# EAGLE board PCB (EAGLE 9.7.0)
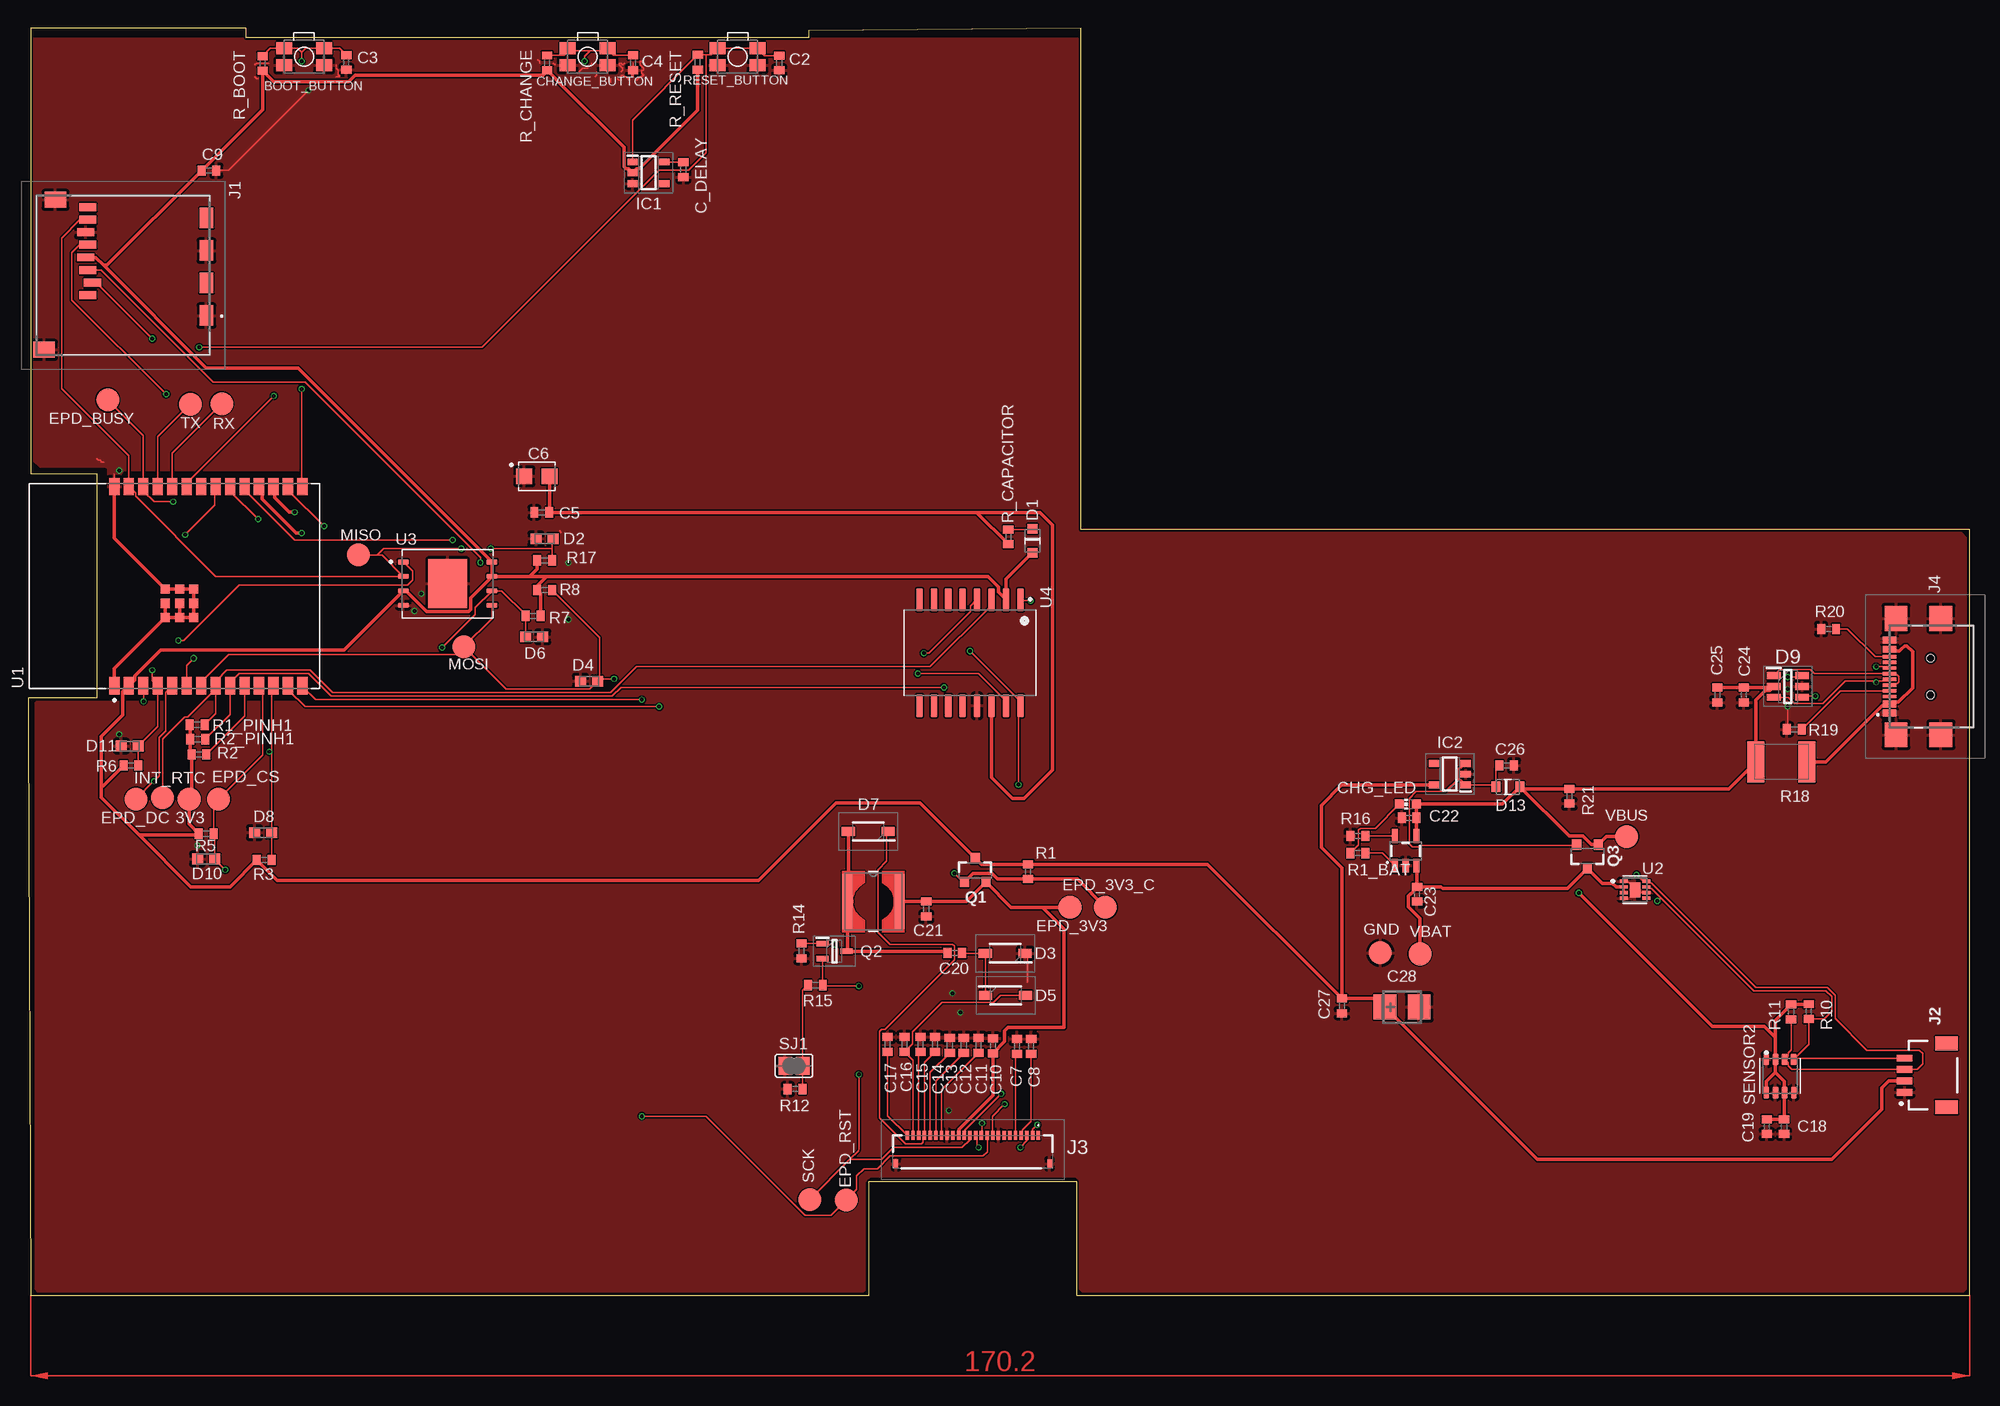
[diagram p0: board, top side]
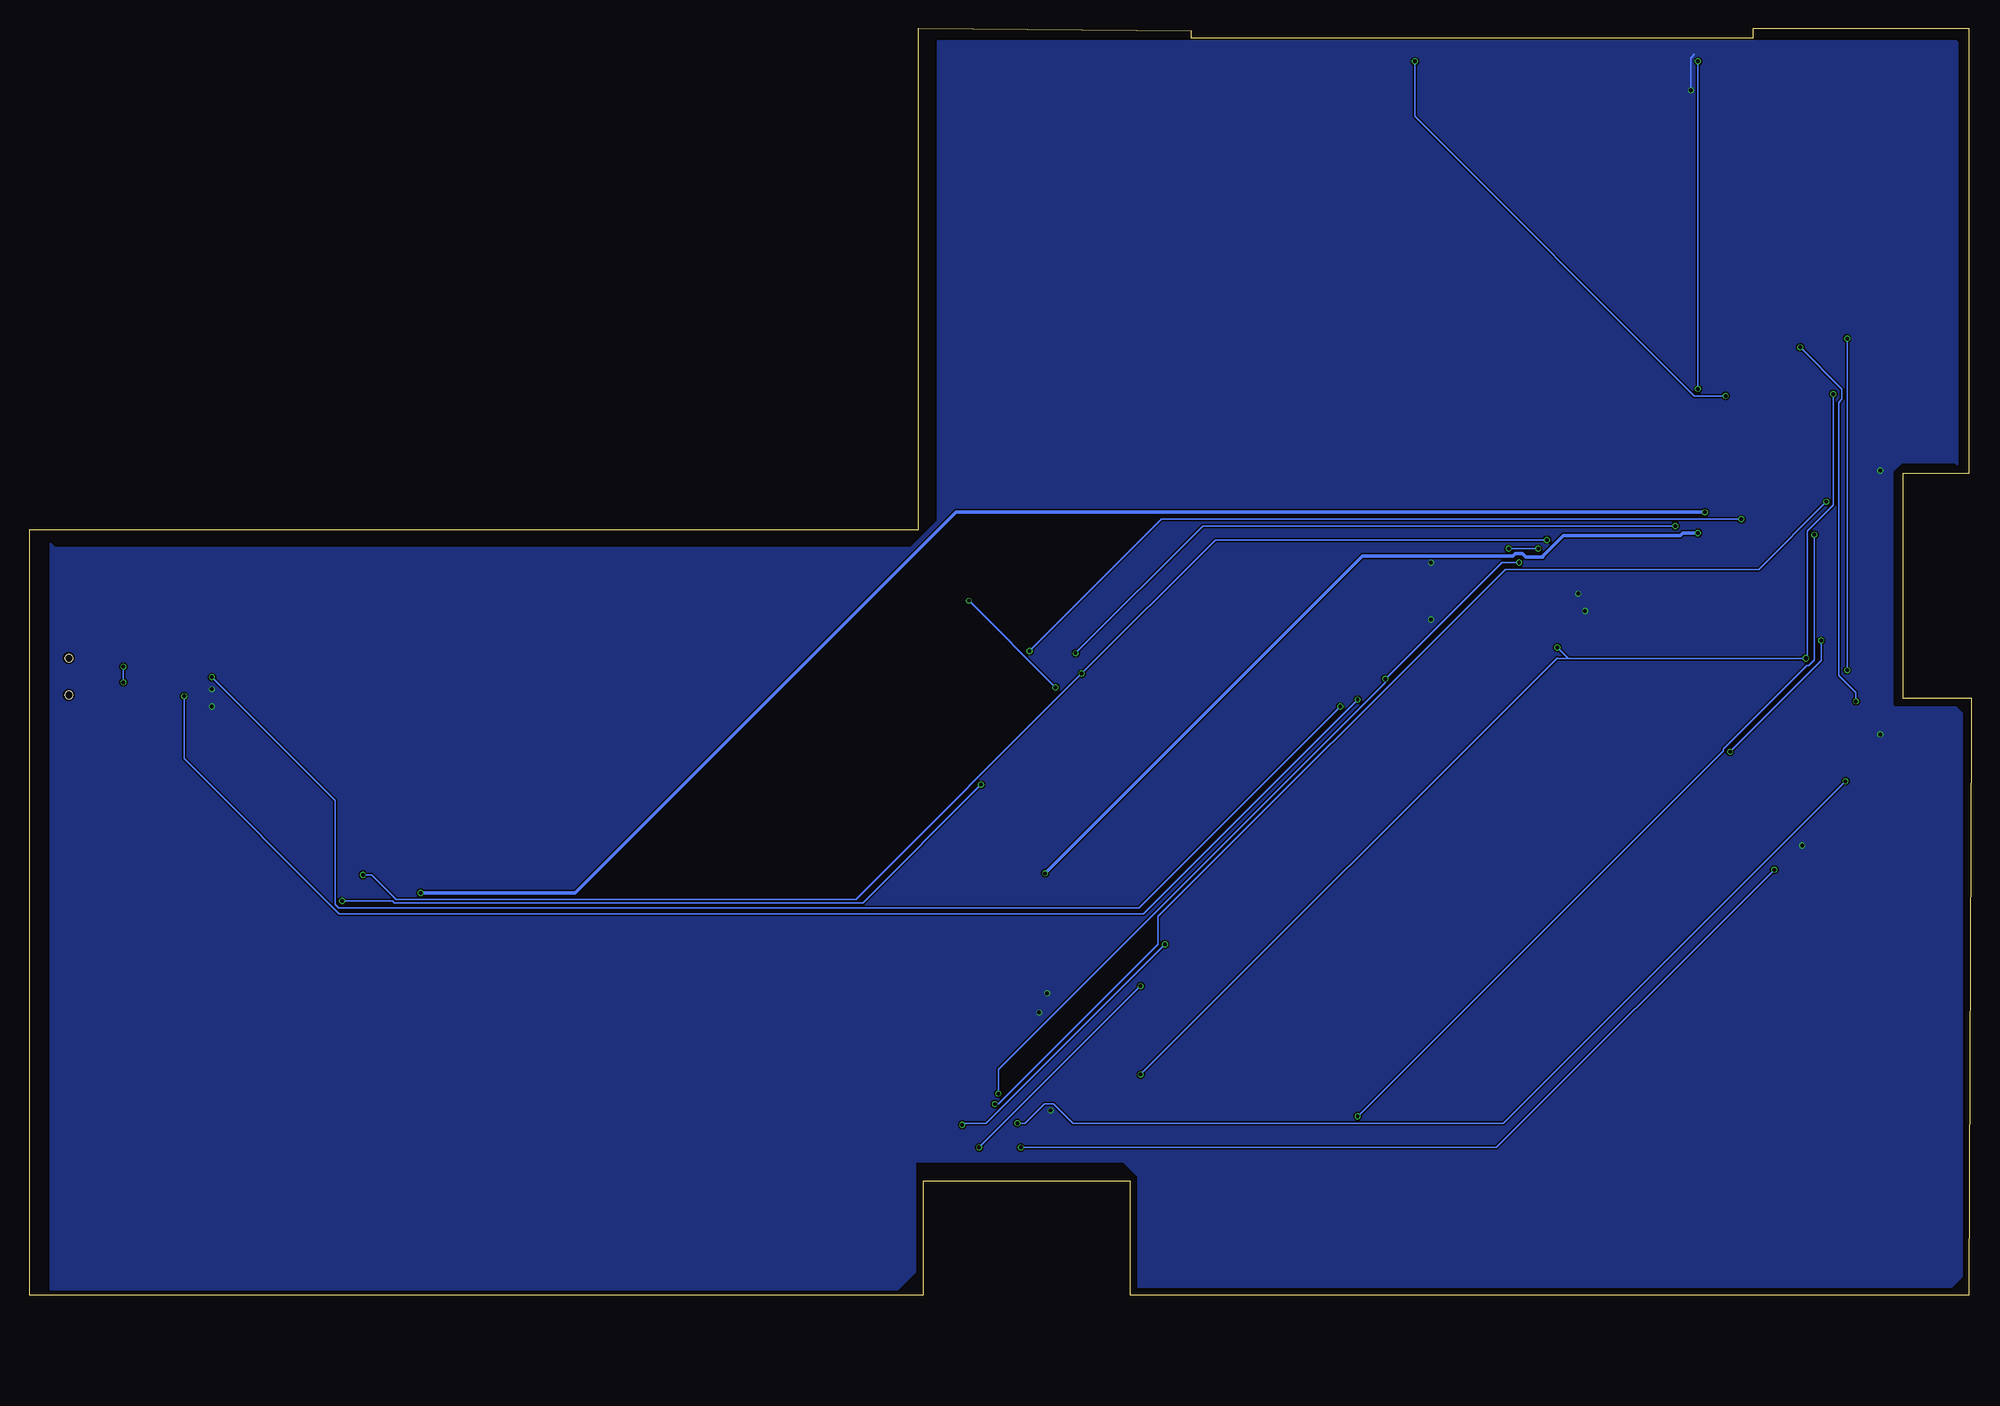
[diagram p1: board, bottom side, seen from below]

Size 170.4 x 111.2 mm. Coordinates in mm from the lower left corner, seen from the top.
Outline: 0.2,0 73.8,0 73.8,10 92,10 92,0 170.4,0 170.4,67.2 92.4,67.2 92.4,111.2 68.5,111 68.5,110.4 19.1,110.4 19.1,111.2 0.2,111.2 0.2,72.1 6,72.1 6,52.4 0,52.4 0,49.9 0.2,0
Copper layers (1*16): Top 0.035mm / dielectric 1.6mm / Bottom 0.035mm
Design rules "jlcpcb-2layers.dru": minimum track width 5mil, minimum drill 0.3mm, track to track 5mil, track to pad 5mil, pad to pad 5mil, via to via 5mil, smd to smd 5mil, copper to edge 0.2mm, drill to drill 6mil, minimum pad ring 10mil, minimum via ring 3mil, stop-mask expansion 4mil, vias tented up to drill 0mil, thermal gap 10mil

## Footprints (pad centres in the part's own frame; a part is rotated, then mirrored left to right if it is on the bottom)
MYBUTTON = smd 1.4 x 1.05: 1 1.75,0.75; 2 -1.75,0.75; 3 -1.75,-0.75; 4 1.75,-0.75
EAGLE-LTSPICE_C0402 = smd 0.7 x 0.9: 1 -0.65,0; 2 0.65,0
CAPCP3225X100N = smd 1.4 x 1.4: 1 -1.1,0; 2 1.1,0
ESP32_WROVER_EAGLE-LTSPICE_C0402 = smd 0.7 x 0.9: 1 -0.65,0; 2 0.65,0
RCL_CT3528 = smd 2 x 2.2: + -1.5,0; - 1.5,0
ADAFRUIT_CHIP-LED0603 = smd 0.8 x 0.8: A 0,-0.75; C 0,0.75
ESP32_WROVER_AVX---SD0805S020S1R0_AVX_SD0805S020S1R0_0 = smd 0.8 x 0.9: 1 -1.05,0; 2 1.05,0
DIOC1608X36N = smd 0.97 x 0.94: 1 -0.75,0; 2 0.75,0
SOD3716X135N = smd 1.15 x 0.8: 1 -1.75,0; 2 1.75,0
SOT95P280X145-6N = smd 1.2 x 0.6: 1 -1.25,0.95; 2 -1.25,0; 3 -1.25,-0.95; 4 1.25,-0.95; 5 1.25,0; 6 1.25,0.95
SOT95P280X125-5N = smd 0.9 x 0.6: 1 -1.4,0.95; 2 -1.4,0; 3 -1.4,-0.95; 4 1.4,-0.95; 5 1.4,0.95
SOT95P280X120-5N = smd 0.9 x 0.6: 1 -1.4,0.95; 2 -1.4,0; 3 -1.4,-0.95; 4 1.4,-0.95; 5 1.4,0.95
112ATAARR03ATTEND = smd 1.8 x 1.2: G1 10.6,10.4; G2 4.9,10.4; S1 7.75,10.4; S2 2.05,10.4 | smd 1.4 x 1.9: G3 13.6,-3.85; G4 0.45,-2.85 | smd 0.7 x 1.5: P1 8.8,0; P2 7.7,0.4; P3 6.6,0; P4 5.5,-0.2; P5 4.4,0; P6 3.3,-0.2; P7 2.2,0; P8 1.1,0
JST04_1MM_RA = smd 0.6 x 1.35: 1 -1.5,0; 2 -0.5,0; 3 0.5,0; 4 1.5,0 | smd 1.2 x 2: NC1 2.8,-3.675; NC2 -2.8,-3.675
FH34SRJ24S05SH99 = smd 0.3 x 0.8: 1 5.75,1.45; 2 5.25,1.45; 3 4.75,1.45; 4 4.25,1.45; 5 3.75,1.45; 6 3.25,1.45; 7 2.75,1.45; 8 2.25,1.45; 9 1.75,1.45; 10 1.25,1.45; 11 0.75,1.45; 12 0.25,1.45; 13 -0.25,1.45; 14 -0.75,1.45; 15 -1.25,1.45; 16 -1.75,1.45; 17 -2.25,1.45; 18 -2.75,1.45; 19 -3.25,1.45; 20 -3.75,1.45; 21 -4.25,1.45; 22 -4.75,1.45; 23 -5.25,1.45; 24 -5.75,1.45 | smd 0.4 x 0.8: MP1 6.75,-1.05; MP2 -6.75,-1.05
SAMACSYS_PARTS_USB4110GFA = smd 0.3 x 1.15: A1 -3.35,3.678; A4 -2.55,3.678; A5 -1.25,3.678; A6 -0.25,3.678; A7 0.25,3.678; A8 1.25,3.678; A9 2.55,3.678; A12 3.35,3.678; B1 3.05,3.678; B4 2.25,3.678; B5 1.75,3.678; B6 0.75,3.678; B7 -0.75,3.678; B8 -1.75,3.678; B9 -2.25,3.678; B12 -3.05,3.678 | smd 2.18 x 2: MP1 -5.11,-0.827; MP2 5.11,-0.827; MP3 -5.11,3.103; MP4 5.11,3.103 | hole 0.65: -1.62,0.063; 1.62,0.063
IND_4828-WE-TPC_WRE = smd 0.889 x 4.826: 1 -2.286,0; 2 2.286,0
ESP32_WROVER_SPARKFUN-IC-POWER_SOT23-5 = smd 0.55 x 1.2: 1 -0.95,-1.3; 2 0,-1.3; 3 0.95,-1.3; 4 0.95,1.3; 5 -0.95,1.3
ESP32_WROVER_SPARKFUN-DISCRETESEMI_SOT23-3 = smd 0.8 x 0.9: 1 -0.95,-1; 2 0.95,-1; 3 0,1.1
SOT65P210X110-3N = smd 1.05 x 0.5: 1 -1.05,0.65; 2 -1.05,-0.65; 3 1.05,0
ESP32_WROVER_EAGLE-LTSPICE_R0402 = smd 0.7 x 0.9: 1 -0.65,0; 2 0.65,0
ESP32C6_VARISTOR_CT/CN1812 = smd 1.5 x 3.6: 1 -2.25,0; 2 2.25,0
ESP32_WROVER_BME680_PSON80P300X300X100-8N = smd 1.016 x 0.5: 1 1.458,1.2; 2 1.458,0.4; 3 1.458,-0.4; 4 1.458,-1.2; 5 -1.458,-1.22; 6 -1.458,-0.4; 7 -1.458,0.4; 8 -1.458,1.2
SJ = smd 1.168 x 1.6: 1 -0.762,0; 2 0.762,0
TP20R = smd 2 x 2: TP 0,0
XCVR_ESP32-C6-WROOM-1-N8 = smd 1.5 x 0.9: 1 -8.75,5.26; 2 -8.75,3.99; 3 -8.75,2.72; 4 -8.75,1.45; 5 -8.75,0.18; 6 -8.75,-1.09; 7 -8.75,-2.36; 8 -8.75,-3.63; 9 -8.75,-4.9; 10 -8.75,-6.17; 11 -8.75,-7.44; 12 -8.75,-8.71; 13 -8.75,-9.98; 14 -8.75,-11.25; 15 8.75,-11.25; 16 8.75,-9.98; 17 8.75,-8.71; 18 8.75,-7.44; 19 8.75,-6.17; 20 8.75,-4.9; 21 8.75,-3.63; 22 8.75,-2.36; 23 8.75,-1.09; 24 8.75,0.18; 25 8.75,1.45; 26 8.75,2.72; 27 8.75,3.99; 28 8.75,5.26 | smd 0.8 x 0.8: 29_1 -2.755,0.79; 29_2 -1.505,0.79; 29_3 -0.255,0.79; 29_4 -2.755,-0.46; 29_5 -1.505,-0.46; 29_6 -0.255,-0.46; 29_7 -2.755,-1.71; 29_8 -1.505,-1.71; 29_9 -0.255,-1.71
SON50P200X200X80-9N = smd 0.76 x 0.27: 1 -0.985,0.75; 2 -0.985,0.25; 3 -0.985,-0.25; 4 -0.985,-0.75; 5 0.985,-0.75; 6 0.985,-0.25; 7 0.985,0.25; 8 0.985,0.75 | smd 0.9 x 1.3: 9 0,0
SON127P600X800X80-9N = smd 0.94 x 0.44: 1 -3.895,1.905; 2 -3.895,0.635; 3 -3.895,-0.635; 4 -3.895,-1.905; 5 3.895,-1.905; 6 3.895,-0.635; 7 3.895,0.635; 8 3.895,1.905 | smd 3.4 x 4.3: 9 0,0
SOIC127P1032X265-16N = smd 2.05 x 0.59: 1 -4.655,4.445; 2 -4.655,3.175; 3 -4.655,1.905; 4 -4.655,0.635; 5 -4.655,-0.635; 6 -4.655,-1.905; 7 -4.655,-3.175; 8 -4.655,-4.445; 9 4.655,-4.445; 10 4.655,-3.175; 11 4.655,-1.905; 12 4.655,-0.635; 13 4.655,0.635; 14 4.655,1.905; 15 4.655,3.175; 16 4.655,4.445

## Placement (x,y rotation side)
BOOT_BUTTON  BUTTON_CUSYOMV1  [MYBUTTON]  24.2,108.71 180 top
C2  1uF  [EAGLE-LTSPICE_C0402]  65.91,108.17 270 top
C3  100nF  [EAGLE-LTSPICE_C0402]  27.9,108.21 270 top
C4  100nF  [EAGLE-LTSPICE_C0402]  53.08,108.18 270 top
C5  100nF  [EAGLE-LTSPICE_C0402]  45.06,68.71 180 top
C6  CPH3225A  [CAPCP3225X100N]  44.63,71.88 0 top
C7  1uF/50V  [EAGLE-LTSPICE_C0402]  86.77,21.83 270 top
C8  1uF/50V  [EAGLE-LTSPICE_C0402]  88.02,21.83 270 top
C9  100nF  [EAGLE-LTSPICE_C0402]  15.84,98.71 0 top
C10  1uF/50V  [EAGLE-LTSPICE_C0402]  84.67,21.88 270 top
C11  1uF/50V  [EAGLE-LTSPICE_C0402]  83.4,21.93 270 top
C12  1uF/50V  [EAGLE-LTSPICE_C0402]  82.11,21.93 270 top
C13  1uF/50V  [EAGLE-LTSPICE_C0402]  80.88,21.91 270 top
C14  1uF/50V  [EAGLE-LTSPICE_C0402]  79.59,22.01 270 top
C15  1uF/50V  [EAGLE-LTSPICE_C0402]  78.3,22.01 270 top
C16  1uF/50V  [EAGLE-LTSPICE_C0402]  76.91,22.01 270 top
C17  1uF/50V  [EAGLE-LTSPICE_C0402]  75.42,22.01 270 top
C18  100nF  [EAGLE-LTSPICE_C0402]  154.12,14.79 270 top
C19  100nF  [EAGLE-LTSPICE_C0402]  152.6,14.79 270 top
C20  4.7uF/25V  [ESP32_WROVER_EAGLE-LTSPICE_C0402]  81.31,30.03 180 top
C21  10uF  [ESP32_WROVER_EAGLE-LTSPICE_C0402]  78.81,33.89 270 top
C22  4.7uF  [EAGLE-LTSPICE_C0402]  121.2,41.9 180 top
C23  4.7uF  [EAGLE-LTSPICE_C0402]  121.9,35.2 270 top
C24  100nF  [ESP32_WROVER_EAGLE-LTSPICE_C0402]  150.58,52.69 270 top
C25  4.7uF  [ESP32_WROVER_EAGLE-LTSPICE_C0402]  148.26,52.69 270 top
C26  4.7uF  [ESP32_WROVER_EAGLE-LTSPICE_C0402]  129.76,46.49 0 top
C27  4.7uF  [ESP32_WROVER_EAGLE-LTSPICE_C0402]  115.3,25.39 270 top
C28  100uF  [RCL_CT3528]  120.58,25.29 0 top
C_DELAY  100nF  [EAGLE-LTSPICE_C0402]  57.49,98.81 270 top
CHANGE_BUTTON  BUTTON_CUSYOMV1  [MYBUTTON]  49.09,108.71 180 top
CHG_LED  [ADAFRUIT_CHIP-LED0603]  121.1,43.1 90 top
D1  ESP32_WROVER_AVX---SD0805S020S1R0_AVX_SD0805S020S1R0_0_0AVX_SD0805S020S1R0_0_0  [ESP32_WROVER_AVX---SD0805S020S1R0_AVX_SD0805S020S1R0_0]  88.13,66.22 270 top
D2  PGB1010603MR  [DIOC1608X36N]  45.3,66.4 0 top
D3  MBR0530  [SOD3716X135N]  85.74,30.01 180 top
D4  PGB1010603MR  [DIOC1608X36N]  49.2,53.9 0 top
D5  MBR0530  [SOD3716X135N]  85.78,26.31 0 top
D6  PGB1010603MR  [DIOC1608X36N]  44.4,57.79 180 top
D7  MBR0530  [SOD3716X135N]  73.72,40.69 180 top
D8  PGB1010603MR  [DIOC1608X36N]  20.6,40.6 0 top
D9  USBLC6-2SC6Y  [SOT95P280X145-6N]  154.46,53.43 0 top
D10  PGB1010603MR  [DIOC1608X36N]  15.6,38.29 0 top
D11  PGB1010603MR  [DIOC1608X36N]  8.9,48.2 0 top
D13  ESP32_WROVER_AVX---SD0805S020S1R0_AVX_SD0805S020S1R0_0_0AVX_SD0805S020S1R0_0_0  [ESP32_WROVER_AVX---SD0805S020S1R0_AVX_SD0805S020S1R0_0]  129.88,44.62 0 top
IC1  BD5229G-TR  [SOT95P280X125-5N]  54.43,98.53 0 top
IC2  XC6220A331MR-G  [SOT95P280X120-5N]  124.77,45.73 180 top
J1  112A-TAAR-R03_ATTEND  [112ATAARR03ATTEND]  5.22,96.6 270 top
J2  QWIIC_RIGHT_ANGLE  [JST04_1MM_RA]  164.71,19.3 90 top
J3  FH34SRJ-24S-0.5SH_99_  [FH34SRJ24S05SH99]  82.9,12.57 0 top
J4  SAMACSYS_PARTS_USB4110-GF-A  [SAMACSYS_PARTS_USB4110GFA]  167.06,54.3 90 top
L3  68uH  [IND_4828-WE-TPC_WRE]  74.17,34.55 0 top
MCP73831  ESP32_WROVER_SPARKFUN-IC-POWER_MCP73831  [ESP32_WROVER_SPARKFUN-IC-POWER_SOT23-5]  120.9,39 0 top
Q1  20V/4.2A/52mΩ/1.4W  [ESP32_WROVER_SPARKFUN-DISCRETESEMI_SOT23-3]  83.11,37.26 0 top
Q2  SI1308EDL-T1-GE3  [SOT65P210X110-3N]  70.75,30.19 0 top
Q3  20V/4.2A/52mΩ/1.4W  [ESP32_WROVER_SPARKFUN-DISCRETESEMI_SOT23-3]  136.86,38.55 180 top
R1  10K  [ESP32_WROVER_EAGLE-LTSPICE_R0402]  87.75,37.17 90 top
R1_BAT  200  [ESP32_WROVER_EAGLE-LTSPICE_R0402]  116.7,38.8 0 top
R1_PINH1  10K  [ESP32_WROVER_EAGLE-LTSPICE_R0402]  14.8,50.07 180 top
R2  10K  [ESP32_WROVER_EAGLE-LTSPICE_R0402]  14.97,47.47 0 top
R2_PINH1  10K  [ESP32_WROVER_EAGLE-LTSPICE_R0402]  14.87,48.8 180 top
R3  10K  [ESP32_WROVER_EAGLE-LTSPICE_R0402]  20.7,38.2 180 top
R5  10K  [ESP32_WROVER_EAGLE-LTSPICE_R0402]  15.6,40.5 180 top
R6  10K  [ESP32_WROVER_EAGLE-LTSPICE_R0402]  9,46.5 180 top
R7  10K  [ESP32_WROVER_EAGLE-LTSPICE_R0402]  44.3,59.63 0 top
R8  10K  [ESP32_WROVER_EAGLE-LTSPICE_R0402]  45.3,61.9 180 top
R10  10K  [ESP32_WROVER_EAGLE-LTSPICE_R0402]  156.28,24.89 90 top
R11  10K  [ESP32_WROVER_EAGLE-LTSPICE_R0402]  154.73,24.87 90 top
R12  2.2  [ESP32_WROVER_EAGLE-LTSPICE_R0402]  67.3,18.09 180 top
R14  10K  [ESP32_WROVER_EAGLE-LTSPICE_R0402]  67.86,30.21 90 top
R15  0.47  [ESP32_WROVER_EAGLE-LTSPICE_R0402]  69.08,27.21 0 top
R16  2K  [ESP32_WROVER_EAGLE-LTSPICE_R0402]  116.7,40.3 0 top
R17  10K  [ESP32_WROVER_EAGLE-LTSPICE_R0402]  45.3,64.5 180 top
R18  ESP32C6_VARISTORCN1812  [ESP32C6_VARISTOR_CT/CN1812]  153.88,46.81 180 top
R19  5K1  [ESP32_WROVER_EAGLE-LTSPICE_R0402]  155.03,49.67 180 top
R20  5K1  [ESP32_WROVER_EAGLE-LTSPICE_R0402]  158.03,58.48 0 top
R21  100K  [ESP32_WROVER_EAGLE-LTSPICE_R0402]  135.26,43.79 270 top
R_BOOT  10k  [ESP32_WROVER_EAGLE-LTSPICE_R0402]  20.56,108.13 270 top
R_CAPACITOR  15  [ESP32_WROVER_EAGLE-LTSPICE_R0402]  86.02,66.57 270 top
R_CHANGE  10k  [ESP32_WROVER_EAGLE-LTSPICE_R0402]  45.53,108.18 270 top
R_RESET  10k  [ESP32_WROVER_EAGLE-LTSPICE_R0402]  58.75,108.23 270 top
RESET_BUTTON  BUTTON_CUSYOMV1  [MYBUTTON]  62.25,108.71 180 top
SENSOR2  BME688  [ESP32_WROVER_BME680_PSON80P300X300X100-8N]  153.76,19.23 90 top
SJ1  [SJ]  67.2,20.13 0 top
TP1  TPTP20R  [TP20R]  14.22,78.22 0 top
TP2  TPTP20R  [TP20R]  16.97,78.25 0 top
TP3  TPTP20R  [TP20R]  122.15,29.95 0 top
TP4  TPTP20R  [TP20R]  118.67,30.05 0 top
TP6  TPTP20R  [TP20R]  14.11,43.55 0 top
TP7  TPTP20R  [TP20R]  91.43,34.05 0 top
TP8  TPTP20R  [TP20R]  28.95,64.97 0 top
TP9  TPTP20R  [TP20R]  38.21,56.93 0 top
TP10  TPTP20R  [TP20R]  68.57,8.37 0 top
TP11  TPTP20R  [TP20R]  6.96,78.59 0 top
TP12  TPTP20R  [TP20R]  16.69,43.55 0 top
TP13  TPTP20R  [TP20R]  9.44,43.55 0 top
TP14  TPTP20R  [TP20R]  71.78,8.35 0 top
TP15  TPTP20R  [TP20R]  94.54,34.05 0 top
TP16  TPTP20R  [TP20R]  140.31,40.25 0 top
TP17  TPTP20R  [TP20R]  11.76,43.65 0 top
U1  ESP32-C6-WROOM-1-N8  [XCVR_ESP32-C6-WROOM-1-N8]  12.8,62.24 90 top
U2  MAX17048G+T10  [SON50P200X200X80-9N]  141.03,35.58 0 top
U3  W25Q512JVEIQ  [SON127P600X800X80-9N]  36.8,62.46 0 top
U4  DS3231SN#  [SOIC127P1032X265-16N]  82.65,56.4 270 top

## Library data of the parts
BOOT_BUTTON CHANGE_BUTTON RESET_BUTTON = DeskAssistant v19 v1; DATASHEET: https://4donline.ihs.com/images/VipMasterIC/IC/PANA/PANAS45028/PANAS45028-1.pdf?hkey=CECEF36DEECDED6468708AAF2E19C0C6; MOUSER_PRICE-STOCK: https://ro.mouser.com/ProductDetail/Panasonic/EVQ-9P701P?qs=NPkb10g2yLBKCwpELvsGNg%3D%3D
C2-C5 C7-C19 C22 C23 C_DELAY = DeskAssistant v19 v1; DATASHEET: https://ro.mouser.com/datasheet/2/447/KEM_C1006_X5R_SMD-3316465.pdf; MOUSER_PRICE-STOCK: https://ro.mouser.com/ProductDetail/KEMET/C0402C475K8PACTU?qs=sGAEpiMZZMsh%252B1woXyUXj%252BeMYF%2FJh1ZHWLnD7xub%252BoY%3D; SPICEMODEL: NONE; SPICEPREFIX: C
C6 = DeskAssistant v19 v1; AVAILABILITY: Not in stock; CHECK_PRICES: https://www.snapeda.com/parts/CPH3225A/Seiko+Instruments/view-part/?ref=eda; DATASHEET: https://mm.digikey.com/Volume0/opasdata/d220001/medias/docus/6537/rev05-CPHCPM.pdf; DESCRIPTION: 11 mF (EDLC) Supercapacitor 3.3 V 1210 (3225 Metric) - -; MF: Seiko Instruments; MP: CPH3225A; PACKAGE: 1210 Seiko; PRICE: None; PURCHASE-URL: https://www.snapeda.com/api/url_track_click_mouser/?unipart_id=562593&manufacturer=Seiko Instruments&part_name=CPH3225A&search_term=None; SNAPEDA_LINK: https://www.snapeda.com/parts/CPH3225A/Seiko+Instruments/view-part/?ref=snap
C20 C21 C24-C27 = DeskAssistant v19 v2; DATASHEET: https://ro.mouser.com/datasheet/2/447/KEM_C1006_X5R_SMD-3316465.pdf; MOUSER_PRICE-STOCK: https://ro.mouser.com/ProductDetail/KEMET/C0402C475K8PACTU?qs=sGAEpiMZZMsh%252B1woXyUXj%252BeMYF%2FJh1ZHWLnD7xub%252BoY%3D; SPICEMODEL: NONE; SPICEPREFIX: C
C28 = DeskAssistant v19 v2; DATASHEET: https://ro.mouser.com/datasheet/2/447/KEM_T2073_T59X-3316825.pdf; MOUSER_PRICE-STOCK: https://ro.mouser.com/ProductDetail/KEMET/T598B335M035ATE150?qs=sGAEpiMZZMsh%252B1woXyUXj9kQnrMN1UR3%252B%2FX%2FiUkAw%2Fg%3D; SPICEPREFIX: C
CHG_LED = DeskAssistant v19 v1; DATASHEET: https://www.vishay.com/doc?82437; MOUSER_PRICE-STOCK: https://ro.mouser.com/ProductDetail/Vishay-Semiconductors/VLMY1301-GS08?qs=sGAEpiMZZMusoohG2hS%252B168PbK3WnfgfiGSE4pxVBaDPiKIho6Ieew%3D%3D
D1 = DeskAssistant v19 v1; CENTROID_NOT_SPECIFIED: No; DATASHEET: http://datasheets.avx.com/schottky.pdf; DIGIKEY_DESCRIPTION: DIODE SCHOTTKY 20V 1A 0805; DIGIKEY_PART_NUMBER: 478-7800-1-ND; LEAD_FREE: yes; MF: AVX; MOUSER_PART_NUMBER: 581-SD0805S020S1R0; PACKAGE: 0805 (2012 metric); PREFIX: D; ROHS: yes; TEMPERATURE_RANGE_HIGH: +125°C; TEMPERATURE_RANGE_LOW: -55°C
D2 D4 D6 D8 D10 D11 = DeskAssistant v19 v2; AVAILABILITY: In Stock; CHECK_PRICES: https://www.snapeda.com/parts/PGB1010603MR/Littelfuse/view-part/?ref=eda; DATASHEET: https://www.littelfuse.com/assetdocs/pulseguard-esd-suppressors-pgb1-datasheet?assetguid=8a337998-d54d-466b-be4e-dc5bcd1f9321; DESCRIPTION: 150V (Typ) Clamp - Ipp Tvs Diode Surface Mount 0603 (1608 Metric); MF: Littelfuse Inc.; MP: PGB1010603MR; PACKAGE: 0603 Littelfuse Inc.; PRICE: None; PURCHASE-URL: https://www.snapeda.com/api/url_track_click_mouser/?unipart_id=5659453&manufacturer=Littelfuse Inc.&part_name=PGB1010603MR&search_term=None; SNAPEDA_LINK: https://www.snapeda.com/parts/PGB1010603MR/Littelfuse/view-part/?ref=snap
D3 D5 D7 = DeskAssistant v19 v2; AVAILABILITY: In Stock; CHECK_PRICES: https://www.snapeda.com/parts/MBR0530/Onsemi/view-part/?ref=eda; DATASHEET: https://www.onsemi.cn/pdf/datasheet/mbr0530-d.pdf; DESCRIPTION: Diode Schottky 30 V 500mA Surface Mount SOD-123; MF: ON Semiconductor; MP: MBR0530; PACKAGE: SOD-123-2 ON Semiconductor; PRICE: None; PURCHASE-URL: https://www.snapeda.com/api/url_track_click_mouser/?unipart_id=179458&manufacturer=ON Semiconductor&part_name=MBR0530&search_term=None; SNAPEDA_LINK: https://www.snapeda.com/parts/MBR0530/Onsemi/view-part/?ref=snap
D9 = DeskAssistant v19 v2; AVAILABILITY: In Stock; CHECK_PRICES: https://www.snapeda.com/parts/USBLC6-2SC6Y/STMicroelectronics/view-part/?ref=eda; DATASHEET: https://ro.mouser.com/datasheet/2/389/usblc6_2sc6y-1852505.pdf; DESCRIPTION: 17V Clamp 5A (8/20µs) Ipp Tvs Diode Surface Mount SOT-23-6; MF: STMicroelectronics; MOUSER_PRICE-STOCK: https://ro.mouser.com/ProductDetail/STMicroelectronics/USBLC6-2SC6Y?utm_campaign=mouser&qs=gNDSiZmRJS%2FOgDexvXkdow==&utm_medium=online&utm_source=snapedaonline&utm_content=model; MP: USBLC6-2SC6Y; PACKAGE: SOT-23-6 STMicroelectronics; PRICE: None; SNAPEDA_LINK: https://www.snapeda.com/parts/USBLC6-2SC6Y/STMicroelectronics/view-part/?ref=snap
D13 = DeskAssistant v19 v2; CENTROID_NOT_SPECIFIED: No; DATASHEET: http://datasheets.avx.com/schottky.pdf; DIGIKEY_DESCRIPTION: DIODE SCHOTTKY 20V 1A 0805; DIGIKEY_PART_NUMBER: 478-7800-1-ND; LEAD_FREE: yes; MF: AVX; MOUSER_PART_NUMBER: 581-SD0805S020S1R0; PACKAGE: 0805 (2012 metric); PREFIX: D; ROHS: yes; TEMPERATURE_RANGE_HIGH: +125°C; TEMPERATURE_RANGE_LOW: -55°C
IC1 = DeskAssistant v19 v1; DATASHEET: https://fscdn.rohm.com/en/products/databook/datasheet/ic/power/voltage_detector/bd52xxg-e.pdf; DESCRIPTION: Voltage Detector with Adjustable Delay Time: CMOS processes are utilized to develop high precision, low current consumption CMOS reset ICs that allow arbitrary setting of the delay time. The extensive lineup includes both Nch Open Drain and CMOS output types in a wide range of detection voltages (from 2.3V to 6.0V, in 0.1V steps), enabling selection of the ideal solution based on customer requirements. In addition, the entire series is of course both lead-free and RoHS-compliant.; HEIGHT: 1.25mm; MANUFACTURER_NAME: ROHM Semiconductor; MANUFACTURER_PART_NUMBER: BD5229G-TR; MOUSER_PART_NUMBER: 755-BD5229G-TR; MOUSER_PRICE-STOCK: https://www.mouser.co.uk/ProductDetail/ROHM-Semiconductor/BD5229G-TR?qs=4kLU8WoGk0vvnhrrYwdszw%3D%3D
IC2 = DeskAssistant v19 v2; DATASHEET: https://ro.mouser.com/datasheet/2/760/xc6220-3371556.pdf; DESCRIPTION: LDO Voltage Regulators; HEIGHT: 1.2mm; MANUFACTURER_NAME: Torex; MANUFACTURER_PART_NUMBER: XC6220A331MR-G; MOUSER_PART_NUMBER: 865-XC6220A331MR-G; MOUSER_PRICE-STOCK: https://www.mouser.co.uk/ProductDetail/Torex-Semiconductor/XC6220A331MR-G?qs=AsjdqWjXhJ8ZSWznL1J0gg%3D%3D
J1 = DeskAssistant v19 v1; DATASHEET: https://www.attend.com.tw/data/download/file/112A-TAAR-R03_Spec.pdf; DESCRIPTION: Micro SD Card Socket, Push-Push Type, Top Mount, SMT, H=1.83mm, 10u; HEIGHT: 1.9mm; MANUFACTURER_NAME: ATTEND; MANUFACTURER_PART_NUMBER: 112A-TAAR-R03 ATTEND; MOUSER_PRICE-STOCK: https://www.digikey.com/en/products/detail/attend-technology/112A-TAAR-R03/17633923
J2 = DeskAssistant v19 v1; DATASHEET: https://ro.mouser.com/datasheet/2/813/Qwiic_Connector_Datasheet-1223982.pdf; MOUSER_PRICE-STOCK: https://ro.mouser.com/ProductDetail/SparkFun/PRT-14417?qs=wd5RIQLrsJhgdz%2FpmZ%2F3GQ%3D%3D&srsltid=AfmBOoqQ1oOwS9wen4cUg5-iBLh8Bm57R1iVLhkDmOc94Djde0aRxIcK; PROD_ID: CONN-13694
J3 = DeskAssistant v19 v1; DATASHEET: https://ro.mouser.com/datasheet/2/185/FH34SRJ_24S_0_5SH_99__CL0580_1255_6_99_2DDrawing_0-1615044.pdf; DESCRIPTION: 24 Position FFC, FPC Connector Contacts, Top and Bottom 0.020" (0.50mm) Surface Mount, Right Angle; HEIGHT: 1.1mm; MANUFACTURER_NAME: Hirose; MANUFACTURER_PART_NUMBER: FH34SRJ-24S-0.5SH(99); MOUSER_PART_NUMBER: 798-FH34SRJ24S05SH99; MOUSER_PRICE-STOCK: https://www.mouser.co.uk/ProductDetail/Hirose-Connector/FH34SRJ-24S-0.5SH99?qs=vcbW%252B4%252BSTIpKBl5ap9J8Fw%3D%3D
J4 = DeskAssistant v19 v2; DATASHEET: https://ro.mouser.com/datasheet/2/837/GCT_USB4110_Product_Drawing___20k_cycles-3455479.pdf; DESCRIPTION: CONN USB 2.0 TYPE-C R/A SMT; HEIGHT: 3.26mm; MANUFACTURER_NAME: GCT (GLOBAL CONNECTOR TECHNOLOGY); MANUFACTURER_PART_NUMBER: USB4110-GF-A; MOUSER_PART_NUMBER: 640-USB4110-GF-A; MOUSER_PRICE-STOCK: https://www.mouser.co.uk/ProductDetail/GCT/USB4110-GF-A?qs=KUoIvG%2F9IlYiZvIXQjyJeA%3D%3D
L3 = DeskAssistant v19 v2; COPYRIGHT: Copyright (C) 2024 Ultra Librarian. All rights reserved.; DATASHEET: https://www.we-online.com/components/products/datasheet/744043680.pdf; MANUFACTURER_PART_NUMBER: 744043680; MFR_NAME: Wurth Electronics; MOUSER_PRICE-STOCK: https://ro.mouser.com/ProductDetail/Wurth-Elektronik/744043680?qs=PGXP4M47uW6VkZq%252BkzjrHA%3D%3D&srsltid=AfmBOoq3PLABygfB0-85eEKpA9SffUYwty425nbkhbFJ01kDNoAxFF7J
MCP73831 = DeskAssistant v19 v1; DATASHEET: https://ro.mouser.com/datasheet/2/268/MCP73831_Family_Data_Sheet_DS20001984H-3441711.pdf; MOUSER_PRICE-STOCK: https://www.mouser.dk/ProductDetail/Microchip-Technology/MCP73831T-3ACI-OT?qs=yUQqVecv4quInAWkk8YFWg%3D%3D; PROD_ID: IC-09995
Q1 = DeskAssistant v19 v1; DATASHEET: https://www.diodes.com/assets/Datasheets/DMG2305UX.pdf; MOUSER_PRICE-STOCK: https://www.digikey.ro/en/products/detail/diodes-incorporated/DMG2305UX-7/4340667; PROD_ID: TRAN-14388
Q2 = DeskAssistant v19 v2; AVAILABILITY: In Stock; CHECK_PRICES: https://www.snapeda.com/parts/SI1308EDL-T1-GE3/Vishay+Siliconix/view-part/?ref=eda; DATASHEET: https://www.vishay.com/docs/63399/si1308edl.pdf; DESCRIPTION: Si1308EDL-T1-GE3 N-channel MOSFET Transistor, 1.5 A, 30 V, 3-Pin SC-70 | Siliconix / Vishay SI1308EDL-T1-GE3; MF: Vishay Siliconix; MP: SI1308EDL-T1-GE3; PACKAGE: SOT-323 Vishay Semiconductor; PRICE: None; PURCHASE-URL: https://www.snapeda.com/api/url_track_click_mouser/?unipart_id=274603&manufacturer=Vishay Siliconix&part_name=SI1308EDL-T1-GE3&search_term=None; SNAPEDA_LINK: https://www.snapeda.com/parts/SI1308EDL-T1-GE3/Vishay+Siliconix/view-part/?ref=snap
Q3 = DeskAssistant v19 v2; DATASHEET: https://www.diodes.com/assets/Datasheets/DMG2305UX.pdf; MOUSER_PRICE-STOCK: https://www.digikey.ro/en/products/detail/diodes-incorporated/DMG2305UX-7/4340667; PROD_ID: TRAN-14388
R1 R1_BAT R1_PINH1 R2 R2_PINH1 R3 R5-R8 R10-R12 R16 R17 R19-R21 R_BOOT R_CAPACITOR R_CHANGE R_RESET = DeskAssistant v19 v1; DATASHEET: https://www.vishay.com/doc?20035; MOUSER_PART_NUMBER: https://eu.mouser.com/ProductDetail/Vishay-Dale/CRCW040240K2FKED?qs=rzhQWu8UUS3g49JmcwYN7w%3D%3D&utm_id=20109199409&utm_source=google&utm_medium=cpc&utm_marketing_tactic=emeacorp&gad_source=1&gclid=EAIaIQobChMI4vv9kZaojAMV7YKDBx2W9Ae5EAAYAiAAEgK9cfD_BwE; SPICEMODEL: NONE; SPICEPREFIX: R
R14 R15 = DeskAssistant v19 v2; DATASHEET: https://www.vishay.com/doc?20035; MOUSER_PRICE-STOCK: https://ro.mouser.com/ProductDetail/Vishay-Dale/CRCW040240K2FKED?qs=rzhQWu8UUS3g49JmcwYN7w%3D%3D&utm_id=20109199409&utm_source=google&utm_medium=cpc&utm_marketing_tactic=emeacorp&gad_source=1&gclid=EAIaIQobChMI4vv9kZaojAMV7YKDBx2W9Ae5EAAYAiAAEgK9cfD_BwE; SPICEMODEL: NONE; SPICEPREFIX: R
R18 = DeskAssistant v19 v2; DATASHEET: https://mm.digikey.com/Volume0/opasdata/d220001/medias/docus/2123/CTVS_Standard_Rev2015.pdf; MOUSER_PRICE-STOCK: https://www.digikey.be/en/products/detail/epcos-tdk-electronics/CN1812K11G/635074?srsltid=AfmBOora8jXqSIsuJ5wbLbjXOKEBe4X6EtjlDXrR_O7ItUtFQ009LUoi
SENSOR2 = DeskAssistant v19 v1; AVAILABILITY: Unavailable; DATASHEET: https://ro.mouser.com/datasheet/2/783/BST_BME680_DS001-1509608.pdf; DESCRIPTION: Integrated Environmental Unit; MF: Bosch Sensortec; MOUSER_PRICE-STOCK: https://ro.mouser.com/ProductDetail/Bosch-Sensortec/BME680?qs=v271MhAjFHjo0yA%2FC4OnDQ%3D%3D; MP: BME680; PACKAGE: LGA-8 Bosch Tools; PRICE: None
SJ1 = DeskAssistant v19 v1
TP1 = DeskAssistant v19 v1; TP_SIGNAL_NAME: TX
TP2 = DeskAssistant v19 v1; TP_SIGNAL_NAME: RX
TP3 = DeskAssistant v19 v1; TP_SIGNAL_NAME: VBAT
TP4 = DeskAssistant v19 v1; TP_SIGNAL_NAME: GND
TP6 = DeskAssistant v19 v1; TP_SIGNAL_NAME: 3V3
TP7 = DeskAssistant v19 v1; TP_SIGNAL_NAME: EPD_3V3
TP8 = DeskAssistant v19 v1; TP_SIGNAL_NAME: MISO
TP9 = DeskAssistant v19 v1; TP_SIGNAL_NAME: MOSI
TP10 = DeskAssistant v19 v1; TP_SIGNAL_NAME: SCK
TP11 = DeskAssistant v19 v1; TP_SIGNAL_NAME: EPD_BUSY
TP12 = DeskAssistant v19 v1; TP_SIGNAL_NAME: EPD_CS
TP13 = DeskAssistant v19 v1; TP_SIGNAL_NAME: EPD_DC
TP14 = DeskAssistant v19 v1; TP_SIGNAL_NAME: EPD_RST
TP15 = DeskAssistant v19 v1; TP_SIGNAL_NAME: EPD_3V3_C
TP16 = DeskAssistant v19 v1; TP_SIGNAL_NAME: VBUS
TP17 = DeskAssistant v19 v1; TP_SIGNAL_NAME: INT_RTC
U1 = DeskAssistant v19 v1; AVAILABILITY: In Stock; CHECK_PRICES: https://www.snapeda.com/parts/ESP32-C6-WROOM-1-N8/Espressif+Systems/view-part/?ref=eda; DATASHEET: https://www.espressif.com/sites/default/files/documentation/esp32-c6-wroom-1_wroom-1u_datasheet_en.pdf; DESCRIPTION: Multiprotocol Modules ESP32-C6 module, Wi-Fi 6 in 2.4 GHz band, Bluetooth 5, Zigbee 3.0 and Thread. ESP34-WROOM Compatible - ENGINEERING SAMPLE; MF: Espressif Systems; MP: ESP32-C6-WROOM-1-N8; PACKAGE: None; PRICE: None; SNAPEDA_LINK: https://www.snapeda.com/parts/ESP32-C6-WROOM-1-N8/Espressif+Systems/view-part/?ref=snap
U2 = DeskAssistant v19 v1; AVAILABILITY: In Stock; CHECK_PRICES: https://www.snapeda.com/parts/MAX17048G+T10/Analog+Devices/view-part/?ref=eda; DATASHEET: https://ro.mouser.com/datasheet/2/609/MAX17048_MAX17049-3469099.pdf; DESCRIPTION: 3µA 1-Cell/2-Cell Fuel Gauge with ModelGauge; MF: Analog Devices; MP: MAX17048G+T10; PACKAGE: TDFN-8 Maxim; PRICE: None; PURCHASE-URL: https://www.snapeda.com/api/url_track_click_mouser/?unipart_id=329239&manufacturer=Analog Devices&part_name=MAX17048G+T10&search_term=None; SNAPEDA_LINK: https://www.snapeda.com/parts/MAX17048G+T10/Analog+Devices/view-part/?ref=snap
U3 = DeskAssistant v19 v1; AVAILABILITY: In Stock; CHECK_PRICES: https://www.snapeda.com/parts/W25Q512JVEIQ/Winbond+Electronics/view-part/?ref=eda; DATASHEET: https://www.winbond.com/resource-files/W25Q512JV%20SPI%20RevB%2006252019%20KMS.pdf; DESCRIPTION: FLASH - NOR Memory IC 512Mb (64M x 8) SPI - Quad I/O 133 MHz 8-WSON (8x6); MF: Winbond Electronics; MP: W25Q512JVEIQ; PACKAGE: Package; PRICE: None; SNAPEDA_LINK: https://www.snapeda.com/parts/W25Q512JVEIQ/Winbond+Electronics/view-part/?ref=snap
U4 = DeskAssistant v19 v1; AVAILABILITY: In Stock; CHECK_PRICES: https://www.snapeda.com/parts/DS3231SN%23/Analog+Devices/view-part/?ref=eda; DATASHEET: https://ro.mouser.com/datasheet/2/609/DS3231-3421123.pdf; DESCRIPTION: Extremely Accurate I²C-Integrated RTC/TCXO/Crystal; MF: Analog Devices; MP: DS3231SN#; PACKAGE: SOIC-16 Maxim; PRICE: None; PURCHASE-URL: https://www.snapeda.com/api/url_track_click_mouser/?unipart_id=99048&manufacturer=Analog Devices&part_name=DS3231SN#&search_term=None; SNAPEDA_LINK: https://www.snapeda.com/parts/DS3231SN%23/Analog+Devices/view-part/?ref=snap

## Nets
3V3: C9.1 C27.1 C28.+ D1.2 IC1.2 IC2.5 J1.P4 J2.2 Q1.3 R1.2 R1_PINH1.2 R2.1 R2_PINH1.2 R3.2 R5.2 R6.2 R7.2 R8.2 R17.2 R_BOOT.2 R_CHANGE.2 R_RESET.2 TP6.TP U1.2 U3.3 U3.7 U3.8 U4.2
32KHZ: R2_PINH1.1 U1.9 U4.1
DN: D9.1 J4.A7 J4.B7
DP: D9.3 J4.A6 J4.B6
EPD_3V3: C10.2 C21.1 J3.15 J3.16 L3.2 Q1.2 TP7.TP
EPD_3V3_C: Q1.1 R1.1 TP15.TP U1.18
EPD_BUSY: J3.9 TP11.TP U1.26
EPD_CS: D10.2 J3.12 R5.1 TP12.TP U1.11
EPD_DC: J3.11 TP13.TP U1.5
EPD_RST: J3.10 TP14.TP U1.21
FLASH_CS: D8.2 R3.1 U1.12 U3.1
GDR: J3.2 Q2.1 R14.2
GND: BOOT_BUTTON.1 BOOT_BUTTON.2 C2.2 C3.2 C4.2 C5.2 C6.1 C7.1 C8.1 C9.2 C10.1 C11.1 C12.1 C13.1 C14.1 C15.1 C16.1 C17.1 C18.2 C19.2 C21.2 C22.2 C23.2 C24.2 C25.2 C26.2 C27.2 C28.- C_DELAY.2 CHANGE_BUTTON.1 CHANGE_BUTTON.2 D2.1 D3.1 D4.1 D6.1 D8.1 D9.5 D10.1 D11.1 IC1.3 IC2.2 J1.G1 J1.G2 J1.G3 J1.G4 J1.P6 J2.1 J3.8 J3.17 J3.MP1 J3.MP2 J4.A1 J4.A12 J4.B1 J4.B12 J4.MP1 J4.MP2 J4.MP3 J4.MP4 MCP73831.2 R12.2 R14.1 R16.1 R19.2 R20.1 R21.2 RESET_BUTTON.1 RESET_BUTTON.2 SENSOR2.1 SENSOR2.5 SENSOR2.7 SJ1.1 TP4.TP U1.1 U1.28 U1.29_1 U1.29_2 U1.29_3 U1.29_4 U1.29_5 U1.29_6 U1.29_7 U1.29_8 U1.29_9 U2.1 U2.4 U2.6 U2.9 U3.4 U3.9 U4.13
GPIO8: R2.2 U1.10
I2C_PW: C18.1 C19.1 R10.2 R11.2 SENSOR2.2 SENSOR2.6 SENSOR2.8 U1.17
INT_RTC: R1_PINH1.1 TP17.TP U1.8 U4.3
IO/BOOT: BOOT_BUTTON.3 BOOT_BUTTON.4 C3.1 R_BOOT.1 U1.15
IO/CHANGE: C4.1 CHANGE_BUTTON.3 CHANGE_BUTTON.4 R_CHANGE.1 U1.23
MISO: D2.2 J1.P7 R17.1 TP8.TP U1.27 U3.2
MOSI: D4.2 J1.P3 J3.14 R8.1 TP9.TP U1.7 U3.5
N$1: C_DELAY.1 IC1.5
N$3: D1.1 R_CAPACITOR.1
N$7: C8.2 J3.4
N$8: C7.2 J3.5
N$9: C20.1 D3.2 D5.1
N$10: MCP73831.1 R1_BAT.2
N$11: J4.A5 R19.1
N$12: CHG_LED.C R1_BAT.1
N$13: MCP73831.5 R16.2
N$16: J4.B5 R20.2
N$18: C26.1 D13.1 IC2.1 IC2.3 Q3.2
N$19: C11.2 J3.18
N$20: C12.2 J3.19
N$21: C13.2 J3.20
N$23: C15.2 J3.22
N$25: C17.2 J3.24
PREVGH: C14.2 D7.1 J3.21
PREVGL: C16.2 D5.2 J3.23
RESE: J3.3 Q2.2 R15.2
RESE': R12.1 R15.1 SJ1.2
RESET: C2.1 IC1.1 R_RESET.1 RESET_BUTTON.3 RESET_BUTTON.4 U1.3
RTC_RST: U1.16 U4.4
RX: TP2.TP U1.24
SCK: D6.2 J1.P5 J3.13 R7.1 TP10.TP U1.6 U3.6
SCL: J2.4 R10.1 SENSOR2.4 U1.20 U2.7 U4.16
SDA: J2.3 R11.1 SENSOR2.3 U1.19 U2.8 U4.15
SRC: C20.2 D7.2 L3.1 Q2.3
SS_SD: D11.2 J1.P2 R6.1 U1.4
TX: TP1.TP U1.25
USB_D+: D9.4 U1.14
USB_D-: D9.6 U1.13
VBAT: C23.1 MCP73831.3 Q3.3 TP3.TP U2.2 U2.3
VBUS: C22.1 C24.1 C25.1 CHG_LED.A D9.2 D13.2 MCP73831.4 Q3.1 R18.2 R21.1 TP16.TP
VRTC: C5.1 C6.2 R_CAPACITOR.2 U4.14
VUSB: J4.A4 J4.A9 J4.B4 J4.B9 R18.1

## Tracks (layer width: path | path; a pad name or v marks a point on that pad's centre or on a via)
3V3
  Top 0.305: 6.6,90.4 6.88,90.4 C9.1 20.56,104.08 R_BOOT.2 21.51,106.53 28.1,106.53 28.67,107.1 45.2,107.1 45.53,107.43 R_CHANGE.2 46.33,106.73 46.33,106.71 52.28,100.77 52.28,99.05 52.45,98.88 52.69,98.88 IC1.2 53.38,98.88 53.61,98.88 58.75,104.02 R_RESET.2 | J1.P4 5.9,91.1 6.6,90.4 | D1.2 85.83,62.87 U4.2 85.16,61.73 85.16,62.16 84.22,63.09 45.5,63.09 | U3.7 44,63.09 | 44,63.09 45.5,63.09 | R1_PINH1.2 14.22,50.01 R2_PINH1.2 14.22,47.57 R2.1 14.32,43.76 TP6.TP 14.11,41.34 R5.2 14.85,40.4 9.7,40.4 | C27.1 118.33,26.04 C28.+ 132.47,11.9 158.3,11.9 162.7,16.3 162.7,18.2 163.3,18.8 J2.2 | C27.1 115.3,37.5 113.5,39.3 113.5,43 115.28,44.78 IC2.5 | C27.1 103.52,37.82 R1.2 83.65,37.82 Q1.3 78.27,43.2 70.9,43.2 64.1,36.4 21.85,36.4 R3.2 17.7,35.85 14.25,35.85 9.7,40.4 | U3.7 U3.8 23.66,81.4 15.6,81.4 6.6,90.4 | U3.7 38.8,61.2 38.8,60.18 38.63,60.01 34.97,60.01 33.15,61.83 U3.3 27.72,56.65 11.6,56.65 9.32,54.37 9.32,54.01 U1.2 8.29,52.98 8.29,50.91 6.4,49.02 6.4,44.7 | R7.2 44.95,61.6 R8.2 44.65,62.24 45.5,63.09 | R6.2 6.55,44.7 6.4,44.7 | 6.4,44.7 6.4,43.7 9.7,40.4 | R17.2 44.65,63.74 44,63.09
32KHZ  (via drill 0.35)
  Top 0.152: R2_PINH1.1 17.7,50.98 U1.9 17.73,53.49 17.73,53.8 18.49,54.56 24.58,54.56 26.56,52.58 51.25,52.58 52.02,53.34 v80.36,53.34 | v87.98,60.96 87.22,60.96 U4.1
  Bottom 0.152: v80.36,53.34 v87.98,60.96
DN
  Top 0.152: D9.1 153.74,54.91 156.41,54.91 156.76,54.55 J4.A7 163.45,54.48 164,54.48 164.18,54.3 164.18,53.8 164.05,53.67 163.5,53.67 J4.B7
DP  (via drill 0.35)
  Top 0.152: D9.3 154.49,52.48 155.01,51.95 157.53,51.95 159.5,53.93 162.2,53.93 | 162.2,53.93 163.26,53.93 J4.A6 | v162.2,55.17 163.27,55.17 J4.B6 | 162.2,53.93 v162.2,53.8
  Bottom 0.152: v162.2,53.8 v162.2,55.17
EPD_3V3
  Top 0.152: J3.16 81.28,14.02 81.58,14.02 J3.15
  Top 0.305: J3.15 81.7,14.06 81.7,14.54 84.67,17.52 C10.2 85.7,22.26 85.7,23.2 86,23.5 90.9,23.5 90.9,32.15 89,34.05 | TP7.TP 89,34.05 | 89,34.05 86.27,34.05 Q1.2 82.34,34.54 C21.1 L3.2
EPD_3V3_C  (via drill 0.35)
  Top 0.152: v81.28,37.03 82.04,36.27 Q1.1
  Top 0.305: Q1.1 82.92,37.02 84.59,37.02 85.08,36.52 R1.1 92.07,36.52 TP15.TP | v23.97,66.9 23.5,66.9 20.5,69.9 20.5,70.73 U1.18
  Bottom 0.305: v81.28,37.03 53.41,64.9 40.2,64.9 40,65.1 39.4,65.1 39.1,64.8 37.6,64.8 37.6,64.9 35.8,66.7 25.5,66.7 25.3,66.9 v23.97,66.9
EPD_BUSY  (via drill 0.35)
  Top 0.152: TP11.TP 10.08,75.48 U1.26 10.11,70.87 10.11,70.56 11.02,69.65 v12.7,69.65 | v85.7,16.76 84.63,15.7 84.63,14.02 J3.9
  Bottom 0.152: v85.7,16.76 85.39,16.76 71.37,30.79 71.37,33.22 40.89,63.7 18.64,63.7 v12.7,69.65
EPD_CS  (via drill 0.35)
  Top 0.152: U1.11 20.54,53.19 20.54,47.4 TP12.TP 16.25,43.11 R5.1 16.35,40.39 16.35,38.41 D10.2 16.35,38.25 v17.27,37.34 | v83.41,12.95 83.26,13.11 83.26,13.87 J3.12
  Bottom 0.152: v83.41,12.95 41.65,12.95 v17.27,37.34
EPD_DC  (via drill 0.35)
  Top 0.152: U1.5 12.03,52.9 12.03,49.51 11.46,48.94 11.46,45.57 v11.01,45.12 | v11.01,45.12 TP13.TP | v83.72,15.09 83.72,14.02 J3.11 | v11.02,45.11 v11.01,45.12
  Bottom 0.152: v83.72,15.09 83.04,15.09 81.32,16.81 80.55,16.81 78.83,15.09 41.04,15.09 v11.02,45.11
EPD_RST  (via drill 0.35)
  Top 0.152: v13.76,66.75 16.35,69.34 16.35,70.87 U1.21 | v53.85,15.7 59.48,15.7 68.17,7.01 70.46,7.01 71.68,8.23 TP14.TP 72.71,9.27 72.71,10.45 73.35,11.09 74.53,11.09 75.63,12.2 83.8,12.2 84.17,12.57 84.17,13.99 J3.10
  Bottom 0.152: v13.76,66.75 13.76,55.74 14.24,55.27 14.44,55.27 21.75,47.95 21.75,47.79 v53.85,15.7
FLASH_CS  (via drill 0.35)
  Top 0.152: R3.1 D8.2 21.35,47.7 | 21.35,47.7 21.35,53.33 U1.12 | v13.15,57.45 13.61,57.45 18.49,62.33 33.27,62.33 33.73,62.79 33.73,63.55 32.97,64.31 U3.1 | 21.35,47.7 v21.15,47.7
  Bottom 0.152: v21.15,47.7 13.15,55.69 v13.15,57.45
GDR  (via drill 0.35)
  Top 0.152: R14.2 69.68,30.86 Q2.1 69.85,30.79 v70.76,30.79 | J3.2 88.15,14.53 v88.56,14.95
  Bottom 0.152: v70.76,30.79 86.46,15.09 88.42,15.09 v88.56,14.95
GND  (via drill 0.35)
  Top 0.152: 12.09,60.66 U1.29_2 | 13.31,60.66 U1.29_5 | 14.37,59.59 U1.29_7 | U2.6 141.93,35.36 141.32,35.36 141.17,35.51 U2.9 140.65,35.96 140.65,36.04 140.36,36.33 U2.1 | 20.16,106.79 20.01,106.79 19.86,106.95 | 19.86,108.01 20.01,108.17 21.08,108.17 | 53.08,108.17 53.08,107.86 52.78,107.56 52.78,107.4 52.93,107.25 52.93,106.95 53.08,106.95 53.08,107.4 C4.2 | 52.32,108.17 52.17,108.01 52.02,108.17 51.86,108.17 51.86,108.01 52.17,107.71 52.17,107.56 52.02,107.4 | 50.95,106.95 50.95,106.49 51.1,106.49 51.1,106.79 | 51.71,106.79 51.86,106.64 52.02,106.64 52.02,107.1 52.17,107.1 52.32,106.95 52.47,106.95 52.78,106.64 | 53.39,106.64 53.69,106.95 53.85,106.95 54,107.1 53.85,107.25 53.85,107.56 54,107.56 54,107.71 53.69,108.01 53.69,108.32 53.85,108.32 54.15,108.01 | 49.73,106.95 49.88,107.1 49.88,107.4 | 50.8,107.56 50.8,107.4 | 49.43,108.01 49.43,108.17 | 49.12,107.71 48.66,107.71 48.36,107.4 | 46.07,108.17 46.23,108.01 | 44.85,108.17 44.85,108.32 44.7,108.47 | 27.02,107.86 27.02,108.01 | 27.02,106.95 27.33,106.95 27.33,107.1 27.18,107.1 27.18,107.56 27.02,107.71 | 5.99,73.46 6.14,73.3 6.3,73.3 6.45,73.15 6.6,73.15 | 7.52,72.08 7.52,71.78 | v7.97,72.39 8.12,72.24 | 8.12,48.31 7.97,48.46 | v154.43,51.66 154.43,49.68 R19.2 | 33.42,60.5 32.97,60.5 U3.4 | J4.A1 J4.B12 | D3.1 87.7,29.8 87.7,27.44 | 46.63,67.1 46.76,66.97 | 80.65,16.05 v80.8,16.2 | J3.8 85.2,13.97 | 14.83,38.41 D10.1 | v24.58,105.77 17.57,98.75 16.51,98.75 C9.2
  Top 0.305: U1.29_7 14.51,59.57 14.53,59.59 14.53,60.72 U1.29_8 U1.29_9 U1.29_6 U1.29_3 7.54,66.45 U1.28 | U1.29_4 13.26,60.61 13.31,60.66 | U1.29_4 14.27,59.48 14.37,59.59 | U1.29_4 U1.29_1 | U1.29_1 12.01,60.58 12.09,60.66 | U1.29_1 7.54,55.02 U1.1
  Bottom 0.152: 24.28,108.93 24.56,108.64 | 24.56,108.64 24.58,108.62 | v24.58,105.77 24.58,108.66 24.56,108.64
  other vias: 7.97,49.23 154.43,53.19 33.88,60.05 34.49,61.57 81.8,24.8 81.1,26.5 47.4,59.3 47.4,64.3 14.83,39.47
  pour Top: 92.26,10.04 92.28,10.02 92.28,0.53 92.53,0.28 169.87,0.28 170.12,0.53 170.12,66.47 169.67,66.92 92.38,66.92 92.36,66.94 92.14,67.16 92.12,67.18 92.12,110.32 0.38,110.32 0.48,73.23 1.03,72.68 6.82,72.68 6.84,72.66 6.96,72.54 6.98,72.52 6.98,70.03 7.03,69.98 8.12,69.98 8.12,72.12 8.14,72.14 8.36,72.36 8.38,72.38 25.72,72.38 25.74,72.36 26.26,71.84 26.28,71.82 26.28,52.58 26.26,52.56 25.84,52.14 25.82,52.12 0.73,52.12 0.58,51.97 0.58,0.53 0.83,0.28 73.27,0.28 73.42,0.43 73.42,9.92 73.44,9.94 73.86,10.36 73.88,10.38 91.92,10.38 91.94,10.36
  pour Bottom: 74.36,11.66 74.38,11.68 92.62,11.68 92.64,11.66 92.66,11.64 92.68,11.62 92.68,2.03 94.23,0.48 168.63,0.48 168.62,0.48 168.62,66.02 168.24,65.64 168.22,65.62 93.08,65.62 93.06,65.64 90.74,67.96 90.72,67.98 90.72,110.07 90.67,110.12 1.33,110.12 1.18,109.97 1.18,72.88 1.36,73.06 1.38,73.08 6.12,73.08 6.14,73.06 6.86,72.34 6.88,72.32 6.88,51.78 6.86,51.76 6.74,51.64 6.72,51.62 1.33,51.62 0.78,51.07 0.78,1.63 1.73,0.68 73.07,0.68 73.12,0.73 73.12,10.42 73.14,10.44
GPIO8
  Top 0.152: R2.2 18.97,50.82 U1.10
I2C_PW  (via drill 0.35)
  Top 0.152: R10.2 | R11.2 154.73,25.5
  Top 0.305: C19.1 C18.1 154.12,17.73 SENSOR2.6 154.16,18.74 153.36,19.54 | 153.36,19.54 SENSOR2.2 153.36,22.4 153.36,22.64 | SENSOR2.8 152.56,18.74 153.36,19.54 | 153.36,22.64 153.36,24.13 154.73,25.5 | R11.2 156.26,25.52 R10.2 | U1.17 21.6,70.9 21.6,70 22.87,68.73 v23.36,68.73 | v136.1,35.3 147.8,23.6 152.4,23.6 153.36,22.64
  Bottom 0.305: v23.36,68.73 89.1,68.73 122.53,35.3 v136.1,35.3
INT_RTC
  Top 0.152: R1_PINH1.1 16.43,51.05 16.43,53.2 | 16.43,53.2 U1.8 16.51,53.49 16.51,53.95 17.42,54.86 24.74,54.86 26.72,52.88 51.1,52.88 53.39,55.17 79.14,55.17 84.48,60.5 84.48,60.96 U4.3 | 16.43,53.2 13.98,50.75 13.71,50.75 11.76,48.81 TP17.TP
IO/BOOT  (via drill 0.35)
  Top 0.152: C3.1 27.3,109.46 BOOT_BUTTON.3 24.33,109.46 23.97,109.1 | R_BOOT.1 21.24,109.46 BOOT_BUTTON.4 23.61,109.46 23.97,109.1 | v23.97,79.55 23.97,71.02 U1.15 | v23.97,108.32 23.97,109.1
  Bottom 0.152: v23.97,108.32 v23.97,79.55
IO/CHANGE  (via drill 0.35)
  Top 0.152: C4.1 51.38,108.83 50.95,109.26 50.84,109.26 | 50.84,109.26 49.3,109.26 | 49.3,109.26 47.45,109.26 47.34,109.15 | 47.34,109.15 47.02,108.83 R_CHANGE.1 | v21.54,78.94 13.92,71.32 13.92,71.02 U1.23 | 50.84,109.26 CHANGE_BUTTON.3 | 47.34,109.15 CHANGE_BUTTON.4 | v48.82,108.32 48.82,108.78 49.3,109.26
  Bottom 0.152: v21.54,78.94 24.28,78.94 48.82,103.48 v48.82,108.32
MISO  (via drill 0.35)
  Top 0.152: 45.95,65.53 R17.1 | 45.95,65.53 45.95,66.3 D2.2 | 30.6,64.97 31.03,64.97 U3.2 16.45,63.09 9.4,70.14 9.4,70.4 U1.27 8.81,73.69 2.9,79.6 2.9,92.81 4.49,94.4 J1.P7 | 30.6,64.97 TP8.TP | v40.59,65.53 45.95,65.53 | v38,65.53 31.16,65.53 30.6,64.97
  Bottom 0.152: v38,65.53 v40.59,65.53
MOSI  (via drill 0.35)
  Top 0.152: TP9.TP 40.7,59.41 U3.5 | R8.1 50.13,57.72 50.13,54.08 D4.2 | D4.2 49.25,53.2 41.94,53.2 TP9.TP | v85.39,17.68 82.19,14.48 82.19,14.02 J3.14 | v51.41,54.1 50.19,54.1 D4.2 | U1.7 15.29,53.49 15.29,53.95 17.57,56.24 37.54,56.24 38.15,56.84 TP9.TP | v39.67,64.31 39.67,64.77 24.28,80.16 16.2,80.16 7.23,89.13 7.21,89.15 6.36,90 J1.P3
  Bottom 0.152: v85.39,17.68 85.39,19.81 51.41,53.8 v51.41,54.1 41.2,64.31 v39.67,64.31
N$1
  Top 0.152: C_DELAY.1 55.85,99.46 IC1.5
N$3
  Top 0.152: R_CAPACITOR.1 86.15,67.21 87.98,67.21 D1.1
N$7
  Top 0.152: C8.2 88.02,15.26 87.27,14.51 87.27,14.14 J3.4
N$8
  Top 0.152: C7.2 86.65,21.05 J3.5
N$9
  Top 0.152: D5.1 84.03,29.97 D3.2 81.98,30.01 C20.1
N$10
  Top 0.152: R1_BAT.2 118.85,38.8 MCP73831.1
N$11
  Top 0.152: R19.1 159.06,53.05 J4.A5
N$12
  Top 0.152: R1_BAT.1 116.77,39.52 116.77,40.84 116.91,40.98 118.23,40.98 CHG_LED.C
N$13
  Top 0.152: MCP73831.5 | MCP73831.5 R16.2
N$16
  Top 0.152: J4.B5 162.11,56.05 159.68,58.48 R20.2
N$18
  Top 0.152: C26.1 128.83,46.21 D13.1 128.67,44.78 IC2.1 125.75,45.2 125.62,45.2 125.52,45.31 | 125.52,45.31 125.49,45.34 125.49,46.12 125.62,46.26 125.75,46.26 IC2.3 | 125.52,45.31 124.41,44.2 121.81,44.2 121.21,43.59 121.21,39.62 121.51,39.32 122.12,39.32 122.27,39.47 135.84,39.47 Q3.2
N$19
  Top 0.152: J3.18 80.15,18.03 C11.2
N$20
  Top 0.152: J3.19 79.65,18.82 C12.2
N$21
  Top 0.152: J3.20 79.15,19.53 C13.2
N$23
  Top 0.152: J3.22 78.15,21.21 C15.2
N$25
  Top 0.152: C17.2 75.42,15.75 J3.24
PREVGH
  Top 0.152: C14.2 78.65,20.42 J3.21 78.53,13.87 78.53,13.41 78.38,13.26 77.01,13.26 74.72,15.54 74.72,23.16 74.88,23.32 75.18,23.32 81.28,29.41 81.28,30.63 81.12,30.79 75.64,30.79 74.57,31.85 74.57,37.34 75.33,38.1 75.33,40.54 D7.1
PREVGL
  Top 0.152: J3.23 77.65,20.62 C16.2 77.62,22.07 77.62,23.11 80.2,25.68 84.7,25.68 85.33,26.31 D5.2
RESE  (via drill 0.35)
  Top 0.152: Q2.2 69.73,29.51 R15.2 69.85,27.13 v72.89,27.13 | v87.07,12.95 87.68,13.56 87.68,13.87 J3.3
  Bottom 0.152: v72.89,27.13 v87.07,12.95
RESE'
  Top 0.152: R15.1 67.96,26.74 SJ1.2 67.96,18.1 R12.1
RESET  (via drill 0.35)
  Top 0.152: C2.1 64.64,108.82 RESET_BUTTON.3 RESET_BUTTON.4 59.92,108.88 59.48,108.88 | 59.48,108.88 R_RESET.1 53.03,103.16 IC1.1 | v10.11,52.12 10.11,53.34 U1.3 | 59.48,108.88 59.48,100.28 57.96,98.75 55.37,98.75 39.82,83.21 v14.98,83.21
  Bottom 0.152: v10.11,52.12 10.11,52.88 11.63,54.41 11.63,78.33 11.32,78.64 11.32,79.55 v14.98,83.21
RTC_RST  (via drill 0.35)
  Top 0.152: v25.96,67.51 22.91,70.56 22.91,70.87 U1.16 | U4.4 83.2,61 82.7,60.5 82.7,60 79.05,56.35 v78.6,56.35
  Bottom 0.152: v25.96,67.51 67.44,67.51 v78.6,56.35
RX
  Top 0.152: TP2.TP 12.62,73.9 U1.24
SCK  (via drill 0.35, 0.4)
  Top 0.152: U1.6 13.89,55.29 v14.5,55.9 | D6.2 R7.1 43.63,59.74 41.55,61.83 U3.6 40.69,61.83 39.21,60.35 39.21,59.74 v36.32,56.84 | v12.09,79.1 3.82,87.37 3.82,91.5 4.52,92.2 J1.P5 | v72.89,19.36 72.89,12.8 72.88,12.69 72.88,12.68 72.1,11.9 | TP10.TP 72.1,11.9 | 72.1,11.9 74.9,11.9 75.95,12.95 81.96,12.95 82.65,13.64 J3.13
  Bottom 0.152: 35.4,55.9 v14.5,55.9 14.37,55.93 14.37,67.06 12.09,69.34 v12.09,79.1 | 35.4,55.9 36.3,55.9 36.32,55.93 v72.89,19.36 | v36.32,56.84 35.4,55.93 35.4,55.9
SCL  (via drill 0.35)
  Top 0.152: J2.4 155.07,20.8 SENSOR2.4 156.28,22.01 R10.1 157.64,24.24 158.3,24.9 158.3,26.2 157.8,26.7 151.46,26.7 143.28,34.88 | U2.7 142.15,35.69 142.47,35.69 143.28,34.88 | v20.16,68.12 17.73,70.56 17.73,70.87 U1.20 | v82.65,56.54 87.07,52.12 87.07,51.82 U4.16 87.07,51.66 86.92,51.51 v86.92,44.81 | v143,34.59 143.28,34.88
  Bottom 0.152: v20.16,68.12 71.07,68.12 v82.65,56.54 | v143,34.59 138.58,34.59 138.43,34.44 97.28,34.44 v86.92,44.81
SDA  (via drill 0.35)
  Top 0.152: R11.1 154.73,21.5 154.48,21.25 154.48,21.01 SENSOR2.3 154.48,20.37 154.48,20.12 154.8,19.8 J2.3 165.8,19.8 166.3,20.3 166.3,21.2 166,21.5 161.39,21.5 158.6,24.28 158.6,26.33 157.93,27 151.66,27 142.47,36.19 142.15,36.19 U2.8 141.93,36.42 141.63,36.42 v141.17,36.88 | v37.23,66.29 23.36,66.29 19.1,70.56 19.1,70.87 U1.19 | v78.08,54.56 83.41,54.56 85.7,52.27 85.7,51.82 U4.15
  Bottom 0.152: v37.23,66.29 66.34,66.29 v78.08,54.56 97.89,34.75 138.27,34.75 140.41,36.88 v141.17,36.88
SRC
  Top 0.152: Q2.3 71.84,30.14 71.88,30.18
  Top 0.305: 71.88,30.18 L3.1 71.97,34.64 D7.2 | Q2.3 80.5,30.19 C20.2
SS_SD  (via drill 0.35)
  Top 0.152: R6.1 D11.2 11.35,49.9 U1.4 11.32,53.49 10.87,53.95 v10.87,54.86 | v10.87,83.97 6.82,88.02 6.75,88.09 5.94,88.9 J1.P2
  Bottom 0.152: v10.87,54.86 v10.87,83.97
TX
  Top 0.152: TP1.TP 11.35,75.35 U1.25
USB_D+  (via drill 0.35)
  Top 0.152: v156.87,52.58 155.8,52.58 D9.4 | v53.85,52.27 25.19,52.27 24.13,53.34 U1.14
  Bottom 0.152: v156.87,52.58 156.87,47.09 143.26,33.48 72.64,33.48 v53.85,52.27
USB_D-  (via drill 0.35)
  Top 0.152: v154.43,54.25 155.65,54.25 D9.6 | v55.37,51.66 24.28,51.66 22.91,53.03 22.91,53.34 U1.13
  Bottom 0.152: v154.43,54.25 143.61,43.43 143.61,34.29 143.3,33.98 73.05,33.98 v55.37,51.66
VBAT
  Top 0.152: U2.3 140.1,35.36 140.1,35.81 U2.2
  Top 0.305: MCP73831.3 121.9,37.65 C23.1 122,35.85 | U2.2 139.38,35.83 139.05,36.16 138.15,36.16 Q3.3 135.09,35.69 124.15,35.69 123.99,35.85 122,35.85 | TP3.TP 122.15,33.07 121.14,34.07 121.14,35.03 121.32,35.2 121.36,35.2 122,35.85
VBUS
  Top 0.305: D13.2 131.11,44.44 R21.1 149.26,44.44 R18.2 151.63,52.23 152.48,53.09 152.86,53.09 D9.2 153.12,53.34 C24.1 C25.1 | MCP73831.4 C22.1 CHG_LED.A 129.41,43.1 D13.2 | D13.2 135.25,40.3 136.43,40.3 137.19,39.55 Q3.1 138.51,40.25 TP16.TP
VRTC
  Top 0.305: 83.23,68.71 C5.1 45.73,68.73 C6.2 | 83.23,68.71 R_CAPACITOR.2 | 83.23,68.71 88.79,68.71 89.9,67.6 89.9,46.1 87.4,43.6 86.4,43.6 84.56,45.45 U4.14
VUSB
  Top 0.152: J4.B4 J4.A9
  Top 0.305: R18.1 157.78,46.81 162.68,51.7 162.7,51.7 162.9,51.9 163.23,51.9 J4.B9 | J4.A4 J4.B9 | J4.B9 164.13,52.05 165.4,53.32 165.4,56.5 164.9,57 164.7,57 164.4,56.7 164.25,56.55 J4.B4
(copper drawn outside any net)
  shapes: Top area x1